# Altium PCB PCBdesign.PcbDoc
Units mil, origin at the board's own origin, x right, y up, seen from the top; angles counter-clockwise.
Board outline 6000 x 4000 mil, 2 copper layers (Top Layer, Bottom Layer); 43 components, 39 nets, 166 pads, 5 vias.
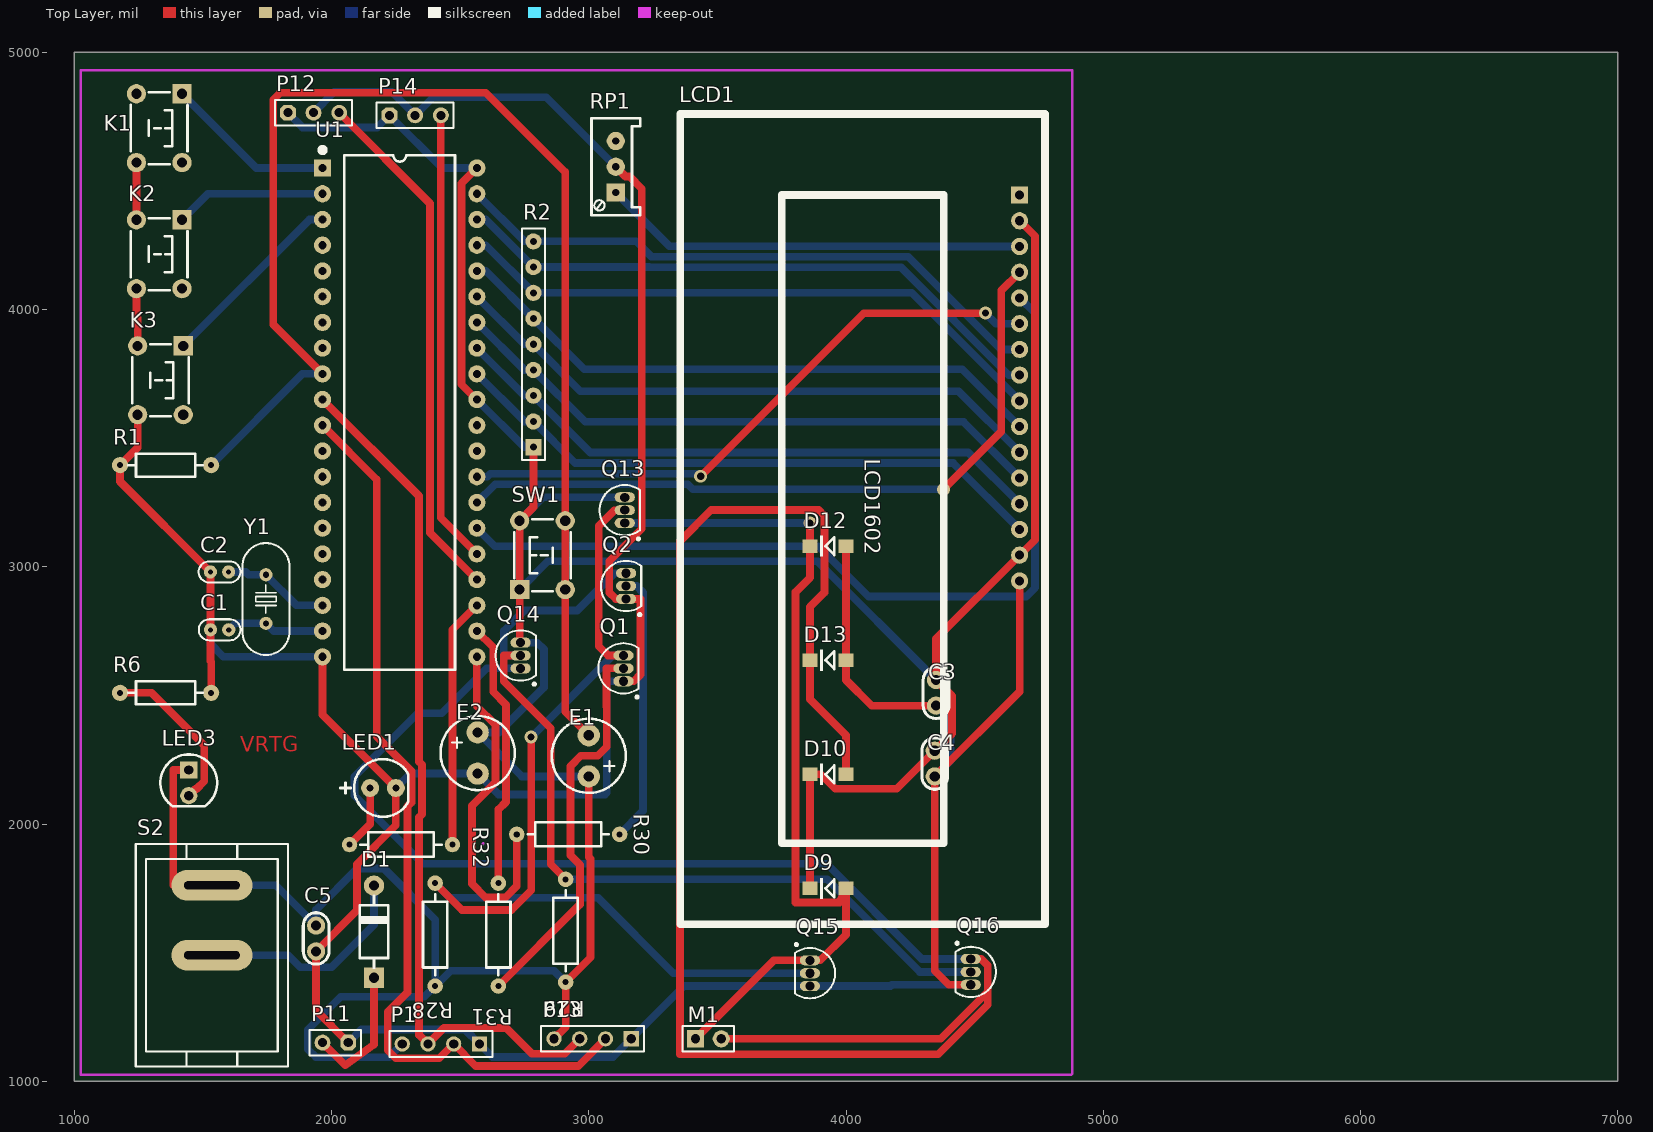
[diagram p0: Top Layer view]
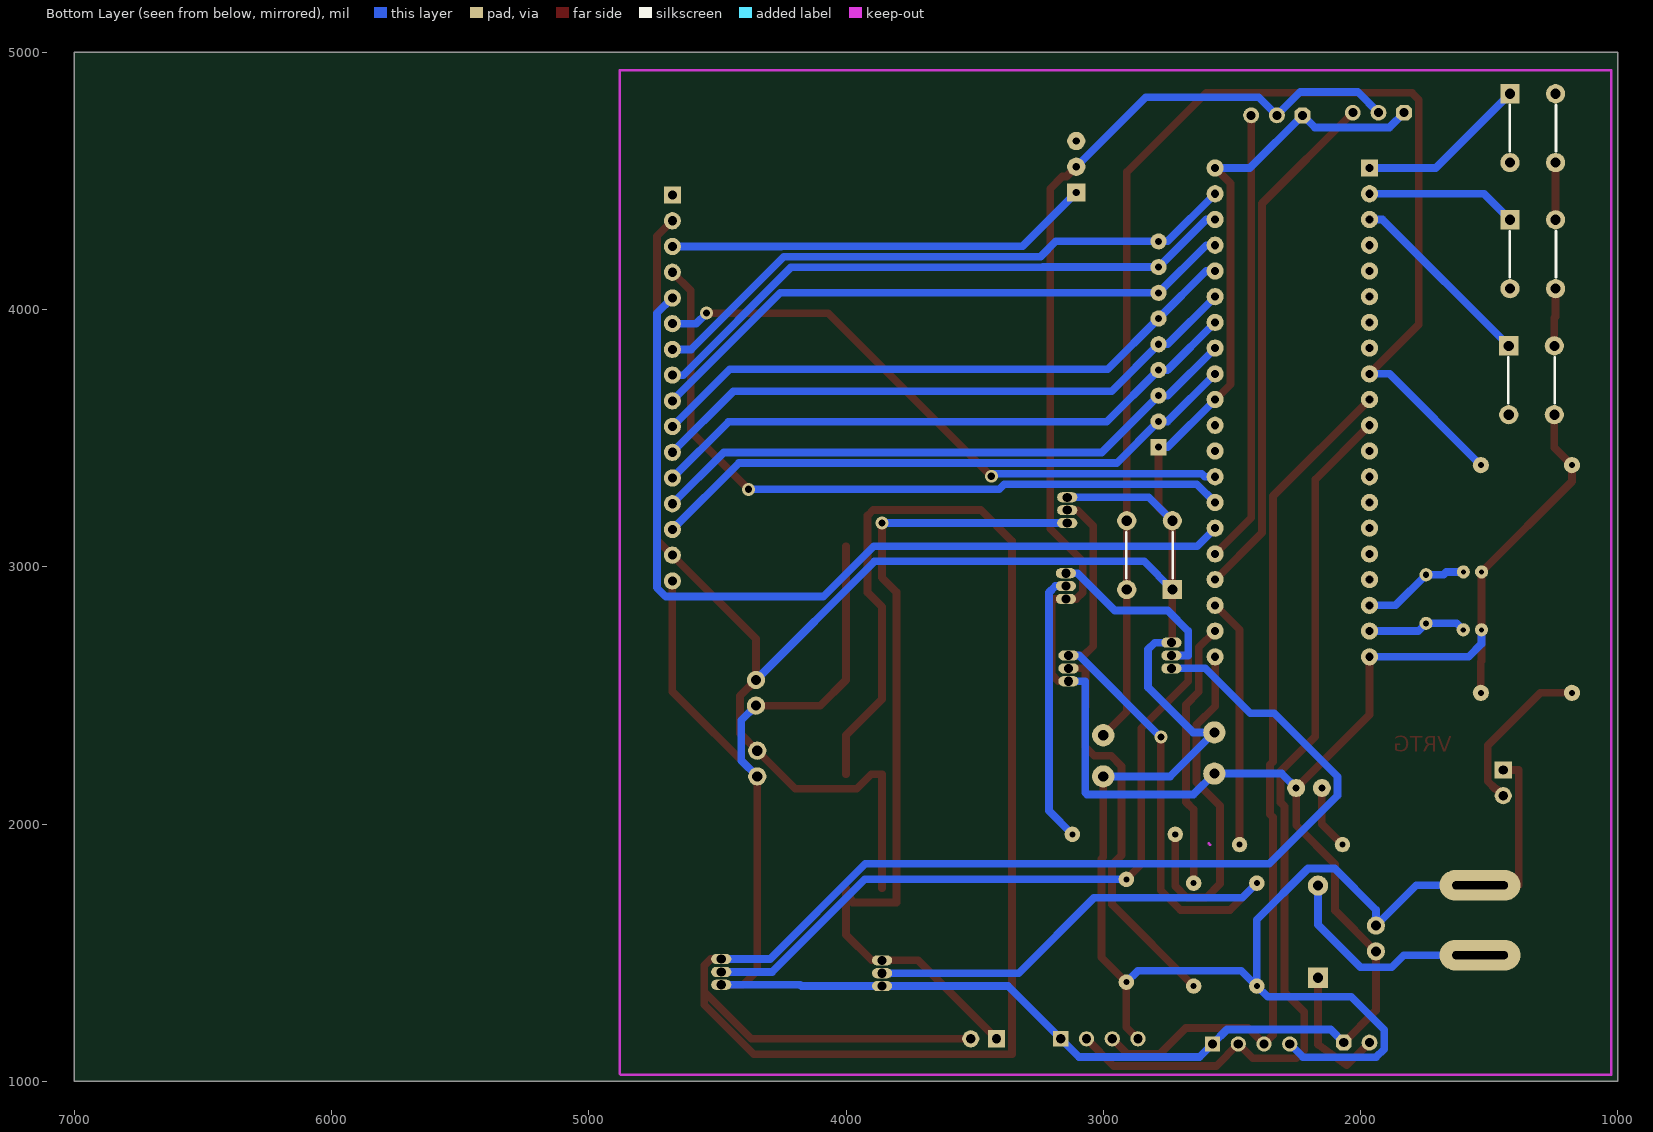
[diagram p1: Bottom Layer view, seen from below]

## Layer stack, top to bottom
Top Solder: solder mask 0.4, Solder Resist, Dk 3.5
Top Layer: signal copper 1.4
Dielectric 1: dielectric 12.6, FR-4, Dk 4.8
Bottom Layer: signal copper 1.4
Bottom Solder: solder mask 0.4, Solder Resist, Dk 3.5

## Board outline
1000,1000 7000,1000 7000,5000 1000,5000

## Design rules (kind name [scope] priority, off if disabled: settings)
Clearance [All] p1: gap=11 ignorepadtopadclearanceinfootprint=TRUE
ComponentClearance [All] p1: gap=0 collisioncheckmode=3 verticalgap=0 showdistances=TRUE
PolygonConnect [All] p1: connectstyle=Relief reliefconductorwidth=10 reliefentries=4 polygonreliefangle="90 Angle" airgapwidth=10
RoutingVias [All] p1: holewidth=28 width=50 viastyle="Through Hole" minholewidth=28 minwidth=50 maxholewidth=28 maxwidth=50
SolderMaskExpansion [All] p1: expansion=4
Width [All] p1: maxlimit=35 minlimit=20 preferedwidth=30
29 further rules are at their usual default settings.

## Components (designator, comment, footprint, x,y, rotation, side; value= is the part's Value field where it differs from the comment)
C1 "33P" "CC 1.8*3.6" 1565,2755 r180 top
C2 "33P" "CC 1.8*3.6" 1564.57,2980 r180 top
C3 "100pF" RAD0.1 4350,2460 r90 top
C4 "104" RAD0.1 4345,2185 r90 top
C5 "104" RAD0.1 1940,1605 r270 top
D1 "N4007" DO-41 2165,1581.5 r90 top
D9 "IN4148" DIODE_SOP 3930,1750 r180 top
D10 "IN4148" DIODE_SOP 3930,2193.33 r180 top
D12 "IN4148" DIODE_SOP 3930,3080 r180 top
D13 "IN4148" DIODE_SOP 3930,2636.67 r180 top
E1 "10uF/16V" CAP_2 3003,2266 r270 top
E2 "470" CAP_2 2565,2275 r90 top
K1 "6x6x5" "TSW DIP-6*6*6" 1330,4705 r270 top
K2 "6x6x5" "TSW DIP-6*6*6" 1330,4215 r270 top
K3 "6x6x5" "TSW DIP-6*6*6" 1335,3725 r270 top
LCD1 "LCD 1602" LCD-1602 4675,4445 r270 top
LED1 "LED" LED-D5 2200,2140 r0 top
LED3 "蓝色" "LED 5MM-G" 1445,2160 r270 top
M1 "HDR-1X2" HDR2.54-LI-2P 3465,1165 r0 top
P1 "HC-05" HDR1X4 2575,1145 r180 top
P11 "POWER" COM2-2.54 2015,1150 r180 top
P12 "COM3-2.54" COM3-2.54 1930,4765 r0 top
P13 "XZ" HDR1X4 3165,1165 r180 top
P14 "COM3-2.54" COM3-2.54 2325,4755 r0 top
Q1 "S8050" TO-92 3135,2605 r90 top
Q2 "S8050" TO-92 3145,2925 r90 top
Q13 "S8050" TO-92 3140,3220 r90 top
Q14 "S8050" TO-92 2735,2655 r90 top
Q15 "S8550" TO-92 3860,1420 r270 top
Q16 "S8550" TO-92 4485,1425 r270 top
R1 "1K" "RS 1/4W" 1355,3395 r180 top
R2 "103" "R SIP9-2.54" 2785,3865 r90 top
R6 "1K" "RS 1/4W" 1355,2510 r180 top
R28 "1K" RES-0.25W-6.5X2.5-10.16-0.6 2402.93,1570 r270 top
R29 "1K" RES-0.25W-6.5X2.5-10.16-0.6 2910,1585 r270 top
R30 "1K" RES-0.25W-6.5X2.5-10.16-0.6 2920,1960 r0 top
R31 "1K" RES-0.25W-6.5X2.5-10.16-0.6 2648.62,1570 r270 top
R32 "1K" RES-0.25W-6.5X2.5-10.16-0.6 2270,1920 r0 top
RP1 "10K" 3296W 3105,4555 r90 top
S2 "POWER" KCD1-101 1535,1490 r90 top
SW1 "6x6x5" "TSW DIP-6*6*6" 2820,3045 r90 top
U1 "STC89C5xx" DIP40-600 2265,3600 r0 top
Y1 "11.0592MHz" "OSC HC-49S" 1745,2874.49 r90 top

## Footprints (in the part's own frame and the unit in brackets; to place one, negate y for a bottom-side part, rotate by r counter-clockwise, add the part's x,y. Pads: shape width x height; smd on the part's side, far side on the other; paste and mask are expansions set on the pad)
3296W [mm] "Precise Multi-Winding Adjustable Resistor"
  rect 1.8x1.8 hole 0.7: 1(-2.54,0)
  round 1.8 hole 0.7: 2(0,0) 3(2.54,0)
  silkscreen extent -4.8,-2.4 4.8,2.4, body extent -4.75,-2.4 4.75,2.4, height 11.52
CAP_2 [mm]
  round 2.2 hole 1: 1(2.057,-0.076) 2(-2.007,-0.076)
  silkscreen extent -3.64,-3.74 3.69,3.59, body extent -4.03,-4.08 4.03,3.97, height 12.03
"CC 1.8*3.6" [mm] "脚距1.8mm直径3.6mm"
  round 1.3 hole 0.5: 1(-0.9,0) 2(0.9,0)
  silkscreen extent -2.05,-1.04 2.05,1.04, body extent -1.8,-0.8 1.8,0.8, height 3.6
COM2-2.54 [mil] "Connector; Header; 2 Position"
  oct 62x62 hole 35: 1(-50,0)
  round 62 hole 35: 2(50,0)
  silkscreen extent -100,-50 100,50, body extent -100,-50 100,50, height 336
COM3-2.54 [mil]
  oct 62x62 hole 35: 1(-100,0)
  round 62 hole 35: 2(0,0) 3(100,0)
  silkscreen extent -150,-50 150,50, body extent -151,-50 149,50, height 398
DIODE_SOP [mm]
  rect 1.5x1.3 smd: 1(-1.778,0) 2(1.778,0)
  silkscreen extent -0.64,-1.02 0.78,1.02, body extent -1.93,-0.72 1.57,0.78, height 1.51
DIP40-600 [mm] "52*15.2*4mm(长宽高)"
  rect 1.7x1.7 hole 0.8: 1(-7.62,24.13)
  round 1.7 hole 0.8: 2(-7.62,21.59) 3(-7.62,19.05) 4(-7.62,16.51) 5(-7.62,13.97) 6(-7.62,11.43) 7(-7.62,8.89) 8(-7.62,6.35) 9(-7.62,3.81) 10(-7.62,1.27) 11(-7.62,-1.27) 12(-7.62,-3.81) 13(-7.62,-6.35) 14(-7.62,-8.89) 15(-7.62,-11.43) 16(-7.62,-13.97) 17(-7.62,-16.51) 18(-7.62,-19.05) 19(-7.62,-21.59) 20(-7.62,-24.13) 21(7.62,-24.13) 22(7.62,-21.59) 23(7.62,-19.05) 24(7.62,-16.51) 25(7.62,-13.97) 26(7.62,-11.43) 27(7.62,-8.89) 28(7.62,-6.35) 29(7.62,-3.81) 30(7.62,-1.27) 31(7.62,1.27) 32(7.62,3.81) 33(7.62,6.35) 34(7.62,8.89) 35(7.62,11.43) 36(7.62,13.97) 37(7.62,16.51) 38(7.62,19.05) 39(7.62,21.59) 40(7.62,24.13)
  silkscreen extent -7.87,-25.4 5.46,26.16, body extent -7.78,-26.18 7.78,26.18, height 4.7
DO-41 [mm] "2.6*9.1mm(直径，脚距）"
  rect 2x2 hole 1: 1(-4.55,0)
  round 2 hole 1: 2(4.55,0)
  silkscreen extent -3.56,-1.4 3.56,1.4, body extent -4.92,-1.29 4.98,1.31, height 2.65
HDR1X4 [mm] "Connector; Header; 4 Position"
  rect 1.5x1.5 hole 0.9: 1(0,0)
  round 1.5 hole 0.9: 2(2.54,0) 3(5.08,0) 4(7.62,0)
  silkscreen extent -1.27,-1.27 8.89,1.27
HDR2.54-LI-2P [mm]
  rect 1.7x1.7 hole 0.9: 1(-1.27,0)
  round 1.7 hole 0.9: 2(1.27,0)
  silkscreen extent -2.54,-1.27 2.54,1.27, body extent -2.54,-1.27 2.54,1.27, height 8.5
KCD1-101 [mm] "船型开关立式"
  oval 3x8 hole 0.8 slot 5.5 at 90 deg: 1(0,0) 2(6.9,0)
  silkscreen extent -10.97,-7.52 10.97,7.52, body extent -10.95,-7.5 10.95,7.5, height 20.3
LCD-1602 [mm] "LCD module 16*2 char"
  rect 1.7x1.7 hole 0.9: 1(0,0)
  round 1.7 hole 0.9: 2(2.54,0) 3(5.08,0) 4(7.62,0) 5(10.16,0) 6(12.7,0) 7(15.24,0) 8(17.78,0) 9(20.32,0) 10(22.86,0) 11(25.4,0) 12(27.94,0) 13(30.48,0) 14(33.02,0) 15(35.56,0) 16(38.1,0)
  silkscreen extent -8,-33.5 72,2.5, body extent -8.15,-33.11 71.85,1.89, height 9
"LED 5MM-G" [mm] "绿色5mm直插LED"
  rect 1.7x1.7 hole 0.9: 1(-1.27,0)
  round 1.7 hole 0.9: 2(1.27,0)
  silkscreen extent -2.8,-2.8 2.33,2.8, body extent -2.85,-2.85 2.45,2.85, height 8.75
LED-D5 [mil] "LED"
  round 70 hole 27.56: 1(-50,0) 2(50,0)
  silkscreen extent -165,-112 98,112, body extent -108,-118 105,119, height 485
"OSC HC-49S" [mm]
  round 1.3 hole 0.6: 1(-2.4,0) 2(2.4,0)
  silkscreen extent -5.52,-2.32 5.52,2.33, body extent -5.52,-2.32 5.53,2.33, height 4.13
"R SIP9-2.54" [mm] "22.6mm*5mm*2.2mm(长*宽*厚)"
  rect 1.6x1.6 hole 0.7: 1(-10.16,0)
  round 1.6 hole 0.7: 2(-7.62,0) 3(-5.08,0) 4(-2.54,0) 5(0,0) 6(2.54,0) 7(5.08,0) 8(7.62,0) 9(10.16,0)
  silkscreen extent -11.43,-1.14 11.43,1.14, body extent -11.31,-0.96 11.31,0.96, height 5.2
RAD0.1 [mm]
  round 1.8 hole 1: 1(0,0) 2(2.54,0)
  silkscreen extent -1.27,-1.27 3.81,1.27
RES-0.25W-6.5X2.5-10.16-0.6 [mil] "Resistor, 0.25W"
  round 60 hole 23.62: 1(-200,0) 2(200,0)
  silkscreen extent -157,-47 157,47, body extent -212,-45 212,46, height 92
"RS 1/4W" [mm] "直插色环电阻，脚距9mm，直径2.3mm"
  round 1.6 hole 0.6: 1(-4.5,0) 2(4.5,0)
  silkscreen extent -3.68,-1.14 3.68,1.14, body extent -4.72,-1.16 4.73,1.16, height 2.32
TO-92 [mm]
  oval 1x2 hole 0.9: 1(-1.27,0) 2(0,0) 3(1.27,0)
  silkscreen extent -2.95,-1.5 2.48,2.48, body extent -2.45,-1.68 2.35,2.32, height 8.09
"TSW DIP-6*6*6" [mm] "6*6*6mm"
  rect 1.9x1.9 hole 1: 1(-3.4,2.25)
  round 1.9 hole 1: 2(-3.4,-2.25) 3(3.4,-2.25) 4(3.4,2.25)
  silkscreen extent -3.56,-2.79 3.56,2.79, body extent -4.11,-3 4.11,3, height 5.95

## Part data
C1 C2: library part C-CC, "直插瓷片电容"
C3 C4 C5: library part 普通电容, "Capacitor"
D1: library part 1N4007, "整流二极管"
E1 E2: library part 电解电容, "Capacitor"
K1 K2 K3 SW1: library part "TSW DIP-6x6", "直插6x6轻触开关"
LED3: library part LED-5MM, "5mm插件LED", BOM名称=5
M1: library part "Header 2", "2P接插件"
P1 P13: library part "Header 4", "Header, 4-Pin", LatestRevisionDate=17-Jul-2002, LatestRevisionNote="Re-released for DXP Platform.", Publisher="Altium Limited"
P11: library part COM2-2.54
Q1 Q2 Q13 Q14: "NPN", Manufacturer #2=8050, PCB DECAL=SOT-23
Q15 Q16: "PNP"
R1 R6: library part R-CRR, "直插色环电阻"
R2: library part "R SIP9", "单列直插排阻"
R28 R29 R30 R31 R32: library part RES, "Resistor"
RP1: library part RP-ID, "插件单联电位器", 学习资源=ww
S2: library part KCD1-101, "1路单刀船型开关"
U1: "STC单片机"
Y1: library part XTAL-2P, "2脚无源脚晶振"
D9 D10 D12 D13: PCB DECAL=DIODE_SOP
LCD1: BOM名称=LC

## Via types
v1: diameter 50, hole 28, Top Layer to Bottom Layer, 5 vias

## Nets (pads, with @x,y where several pads share a name; then routed paths per layer and width w, separated by ;. In a path a pad name is that pad's centre, name@x,y a point inside that pad or via, vN(x,y) a via of type N, cw(c..) or ccw(c..) an arc to the next point about the centre after c; other vN are vias at no path point)
GND: C1.2 C2.2 C3.1 C4.1 C5.2 D12.1 D13.1 E2.2 K3.3 LCD1.16 LED1.2 P1.1 P11.1 P12.2 P13.1 P14.2 Q1.1 Q2.1 Q15.3 Q16.3 R1.2 R6.1 RP1.2 U1.20 | length 14243.5
  Top Layer w30: K3.3 1246.42,3463.58 R1.2 1177.83,3331.3 C2.2 1529.13,2867.43 1529.57,2867 C1.2 1529.57,2633.6 1532.17,2631 R6.1 ; U1.20 1965,2425 LED1.2 2250,1995 2099,1844 2099,1664 C5.2 1940,1275 P11.1 ; RP1.2 3143,4517 3159,4517 3206,4470 3206,3147.37 3079.63,3021 3079.63,2900 3104.63,2875 Q2.1 3201,2875 3201,2581 3175,2555 Q1.1 ; D12.1 D13.1 4000,2560 4100,2460 C3.1 ; Q16.3 4400,1375 4345,1430 C4.1 4675,2515 LCD1.16
  Bottom Layer w30: C1.2 1529.57,2700 1579.57,2650 U1.20 ; P12.2 2011,4846 2234,4846 P14.2 2395,4825 2835,4825 RP1.2 ; P11.1 2116,1201 2519,1201 P1.1 2626,1094 3094,1094 P13.1 3370,1370 Q15.3 4173,1370 4178,1375 Q16.3 ; LED1.2 2306,2196 E2.2 2649,2115 3063,2115 3070,2122 3070,2555 Q1.1 ; C4.1 4407,2247 4407,2403 C3.1
NetD1_1: D1.1 P11.2 | length 522
  Top Layer w30: P11.2 2053,1062 2165,1143 D1.1
NetD1_2: D1.2 S2.1 | length 870.4
  Bottom Layer w30: S2.1 1832,1490 1879,1443 2000,1443 2165,1608 D1.2
NetD9_1: D9.1 D12.2 M1.1 Q13.1 Q15.1 | length 3382.4
  Top Layer w30: M1.1 3720,1470 Q15.1 3900,1470 4000,1570 D9.1 3975,1695 3804,1695 3804,2902 3860,2958 D12.2 v1(3860,3170)
  Bottom Layer w30: Q13.1 v1(3860,3170)
NetD10_1: D10.1 D13.2 M1.2 Q14.1 Q16.1 | length 9871.6
  Top Layer w30: M1.2 4368,1165 4551,1348 ; D10.1 4000,2345 3860,2485 D13.2 3860,2844 3916,2900 3916,3199 3894,3221 3476,3221 3355,3100 3355,1105 4359,1105 4551,1297 4551,1348 ; Q16.1 4526,1475 4551,1450 4551,1348
  Bottom Layer w30: Q14.1 2604,2605 2429,2430 2335,2430 2089,2184 2089,2111 2355,1845 3925,1845 4295,1475 Q16.1
NetK1_3: K1.3 K2.2 | length 222.3
  Top Layer w30: K2.2 K1.3
NetK2_3: K2.3 K3.2 | length 224.4
  Top Layer w30: K2.3 1241.42,3972 1246.42,3967 K3.2
NetLCD1_3: LCD1.3 RP1.1 | length 1657
  Bottom Layer w30: RP1.1 3314,4246 4251,4246 4252,4245 LCD1.3
NetLED1_1: LED1.1 R32.1 | length 253.1
  Top Layer w30: R32.1 2150,2000 LED1.1
NetLED3_2: LED3.2 R6.2 | length 634.3
  Top Layer w30: R6.2 1300,2510 1505,2305 1505,2166 1475,2136 1471,2136 LED3.2
NetQ1_1: Q1.2 R31.2 | length 1545.3
  Top Layer w30: R31.2 2966,1687.38 2966,1841 2929,1878 2929,2225 2969,2265 3035,2265 3070,2300 3070,2456 3069,2457 3069,2605 Q1.2
NetQ1_3: Q1.3 Q13.2 Q15.2 R28.1 | length 3841.5
  Top Layer w30: R28.1 2506.93,1666 2700,1666 2776,1742 v1(2776,2338) ; Q1.3 3075,2655 3038.63,2691.37 3038.63,3158.63 3100,3220 Q13.2
  Bottom Layer w30: R28.1 2459.93,1713 3036,1713 3329,1420 Q15.2 ; v1(2776,2338) 3093,2655 Q1.3
NetQ2_1: Q2.2 R30.2 | length 1054
  Bottom Layer w30: R30.2 3211,2051 3211,2900 3186,2925 Q2.2
NetQ2_3: Q2.3 Q14.2 Q16.2 R29.1 | length 3489.3
  Top Layer w30: Q14.2 2669.63,2655 2669.63,2555 2852,2372.63 2852,1843 R29.1
  Bottom Layer w30: Q14.2 2669,2655 2669,2750 2749,2830 2955,2830 3100,2975 Q2.3 ; R29.1 3927,1785 4287,1425 Q16.2
P00: LCD1.7 R2.9 U1.39 | length 2360.6
  Bottom Layer w30: U1.39 2750,4265 R2.9 3184,4265 3244,4205 4242,4205 4602,3845 LCD1.7
P01: LCD1.8 R2.8 U1.38 | length 2360.6
  Bottom Layer w30: U1.38 2600,4350 R2.8 3234,4165 3235,4164 4213.98,4164 4632.98,3745 LCD1.8
P02: LCD1.9 R2.7 U1.37 | length 2360.6
  Bottom Layer w30: U1.37 2600,4250 R2.7 4255,4065 LCD1.9
P03: LCD1.10 R2.6 U1.36 | length 2360.6
  Bottom Layer w30: U1.36 2600,4150 R2.6 2982.1,3767.9 4452.1,3767.9 LCD1.10
P04: LCD1.11 R2.5 U1.35 | length 2360.6
  Bottom Layer w30: U1.35 2750,3865 R2.5 2967.2,3682.8 4437.2,3682.8 LCD1.11
P05: LCD1.12 R2.4 U1.34 | length 2360.6
  Bottom Layer w30: U1.34 2750,3765 R2.4 2986.49,3563.51 4456.49,3563.51 LCD1.12
P06: LCD1.13 R2.3 U1.33 | length 2360.6
  Bottom Layer w30: U1.33 2750,3665 R2.3 3005.74,3444.26 4475.74,3444.26 LCD1.13
P07: LCD1.14 R2.2 U1.32 | length 2360.6
  Bottom Layer w30: U1.32 2750,3565 R2.2 2947,3403 4417,3403 LCD1.14
P10: K1.1 U1.1 | length 666.1
  Bottom Layer w30: K1.1 1707.44,4550 U1.1
P11: K2.1 U1.2 | length 588.3
  Bottom Layer w30: K2.1 1519.72,4450 U1.2
P12: K3.1 U1.3 | length 744.9
  Bottom Layer w30: K3.1 1914.72,4350 U1.3
P20: R30.1 U1.21 | length 1365.8
  Top Layer w30: U1.21 2565,2458 2637.31,2385.69 2637.31,2162.31 2546,2071 2546,1768 2600,1714 2675,1714 2720,1759 R30.1
P21: R31.1 U1.22 | length 1039.2
  Top Layer w30: U1.22 2628.63,2686.37 2628.63,2513.71 2678.31,2464.03 2678.31,2085.69 2648.62,2056.01 R31.1
P22: R32.2 U1.23 | length 969.4
  Top Layer w30: R32.2 2470,2755 U1.23
P23: P12.3 U1.24 | length 2036.6
  Top Layer w30: P12.3 2383,4412 2383,3132 U1.24
P24: P14.3 U1.25 | length 1763
  Top Layer w30: P14.3 2425,3190 U1.25
P25: LCD1.5 U1.26 | length 3445.5
  Bottom Layer w30: U1.26 2635,3080 3892,3080 4088,2884 4700,2884 4735,2919 4735,3985 LCD1.5
P26: LCD1.4 U1.27 | length 2818.3
  Top Layer w30: v1(4379,3301) 4604,3526 4604,4074 LCD1.4
  Bottom Layer w30: U1.27 2636,3321 3384.08,3321 3404.08,3301 v1(4379,3301)
P27: LCD1.6 U1.28 | length 2398.7
  Top Layer w30: v1(3435,3352) 4069,3986 v1(4542,3986)
  Bottom Layer w30: U1.28 2605,3350 2617,3362 3425,3362 v1(3435,3352) ; v1(4542,3986) 4583,3945 LCD1.6
RES: E1.2 R1.1 SW1.2 SW1.3 U1.9 | length 5227.3
  Top Layer w30: U1.9 1773,3942 1773,4816 1800,4843 2600,4843 2908.58,4534.42 SW1.3 SW1.2 2908.58,2436.42 E1.2
  Bottom Layer w30: R1.1 1887.17,3750 U1.9
RXD: P1.3 P13.3 U1.10 | length 3366.1
  Top Layer w30: U1.10 2340,3275 2340,2242 2352,2230 2352,2038 2340,2026 2340,1180 P1.3 2437,1207 2679,1207 2779.24,1106.76 2906.76,1106.76 P13.3
TXD: P1.2 P13.2 U1.11 | length 3573
  Top Layer w30: U1.11 2176,3339 2176,2340 2311,2205 2311,2084 2295,2068 2295,1345 2219,1269 2219,1120 2250,1089 2419,1089 P1.2 2561,1059 2959,1059 P13.2
VCC: C3.2 C4.2 C5.1 D9.2 D10.2 E1.1 E2.1 LCD1.2 LCD1.15 LED3.1 P1.4 P12.1 P13.4 P14.1 Q13.3 Q14.3 R2.1 R28.2 R29.2 S2.2 SW1.1 SW1.4 U1.31 U1.40 | length 14324.6
  Top Layer w30: LED3.1 1385,2210 1385,1761.65 S2.2 ; U1.31 2505,3710 2505,4490 U1.40 ; Q14.3 2731.42,2705 SW1.1 SW1.4 2785,3232.44 R2.1 ; P13.4 2910,1210 R29.2 3007,1482 3007,1864 3000,1871 E1.1 ; D9.2 D10.2 3901.67,2193.33 3958,2137 4197,2137 C4.2 4412,2352 4412,2498 C3.2 4350,2720 LCD1.15 4735,3105 4735,4285 LCD1.2
  Bottom Layer w30: S2.2 1783.35,1761.65 C5.1 1940,1667 2100,1827 2204,1827 2402.93,1628.07 R28.2 ; P12.1 1887,4708 2178,4708 P14.1 2430,4550 U1.40 ; P1.4 2223,1093 1940,1093 1908,1125 1908,1200 2036,1328 2360.93,1328 R28.2 ; U1.31 2750,3465 R2.1 ; SW1.1 2841.28,3021 3889,3021 C3.2 ; SW1.4 2822.56,3270 Q13.3 ; Q14.3 2800,2705 2826,2679 2826,2531 2651,2356 E2.1 2739,2185 E1.1 ; R29.2 2865,1430 2462.93,1430 R28.2
X1: C2.1 U1.18 Y1.2 | length 418.8
  Bottom Layer w30: C2.1 1666,2980 1677.02,2968.98 Y1.2 1863.98,2850 U1.18
X2: C1.1 U1.19 Y1.1 | length 387.3
  Bottom Layer w30: C1.1 1625.43,2780 Y1.1 1775,2750 U1.19
pads on no net: K1.2 K1.4 K2.4 K3.4 LCD1.1 RP1.3 U1.4 U1.5 U1.6 U1.7 U1.8 U1.12 U1.13 U1.14 U1.15 U1.16 U1.17 U1.29 U1.30

## Keep-outs
Keep-Out Layer:
  lines w10: 2585,1920 2590,1925 ; 4875,1025 1025,1025 1025,4930 4880,4930 4880,1030

## Other copper
Top Layer:
  text "VRTG" at 1645,2280 h60

## Text inside footprints (layer, text, board x,y; h text height)
LCD1: Top Overlay "LCD1602" at 4073.43,3419.96 h60 r270